# EAGLE board light sensor basic copy (EAGLE 9.6.2)
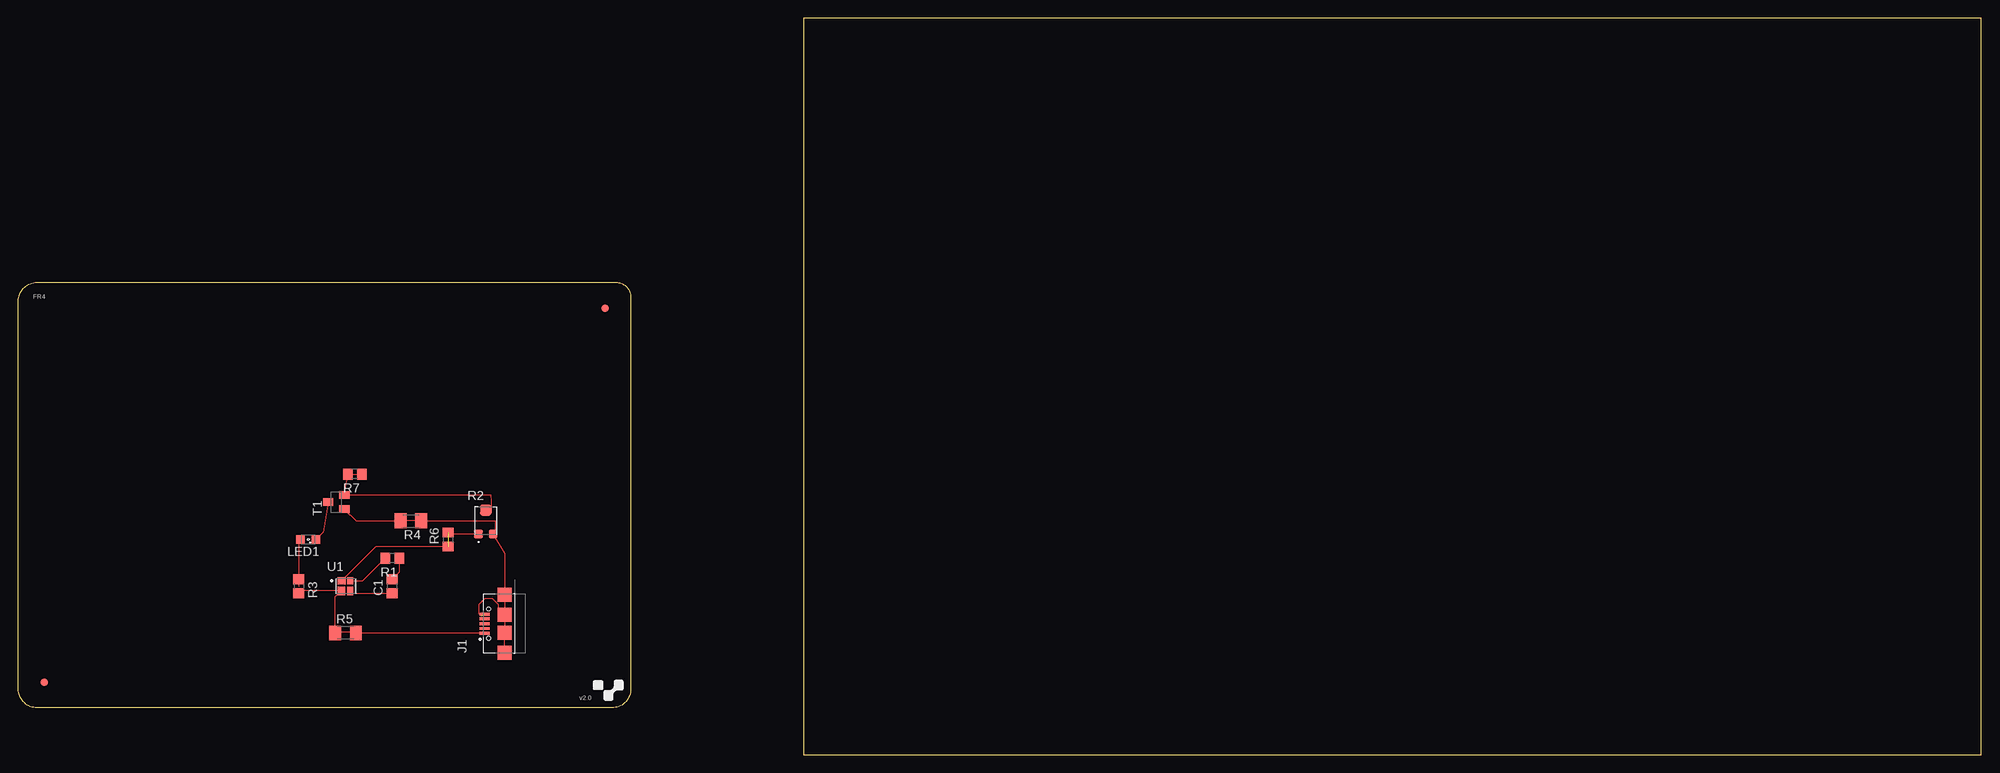
[diagram p0: board, top side]
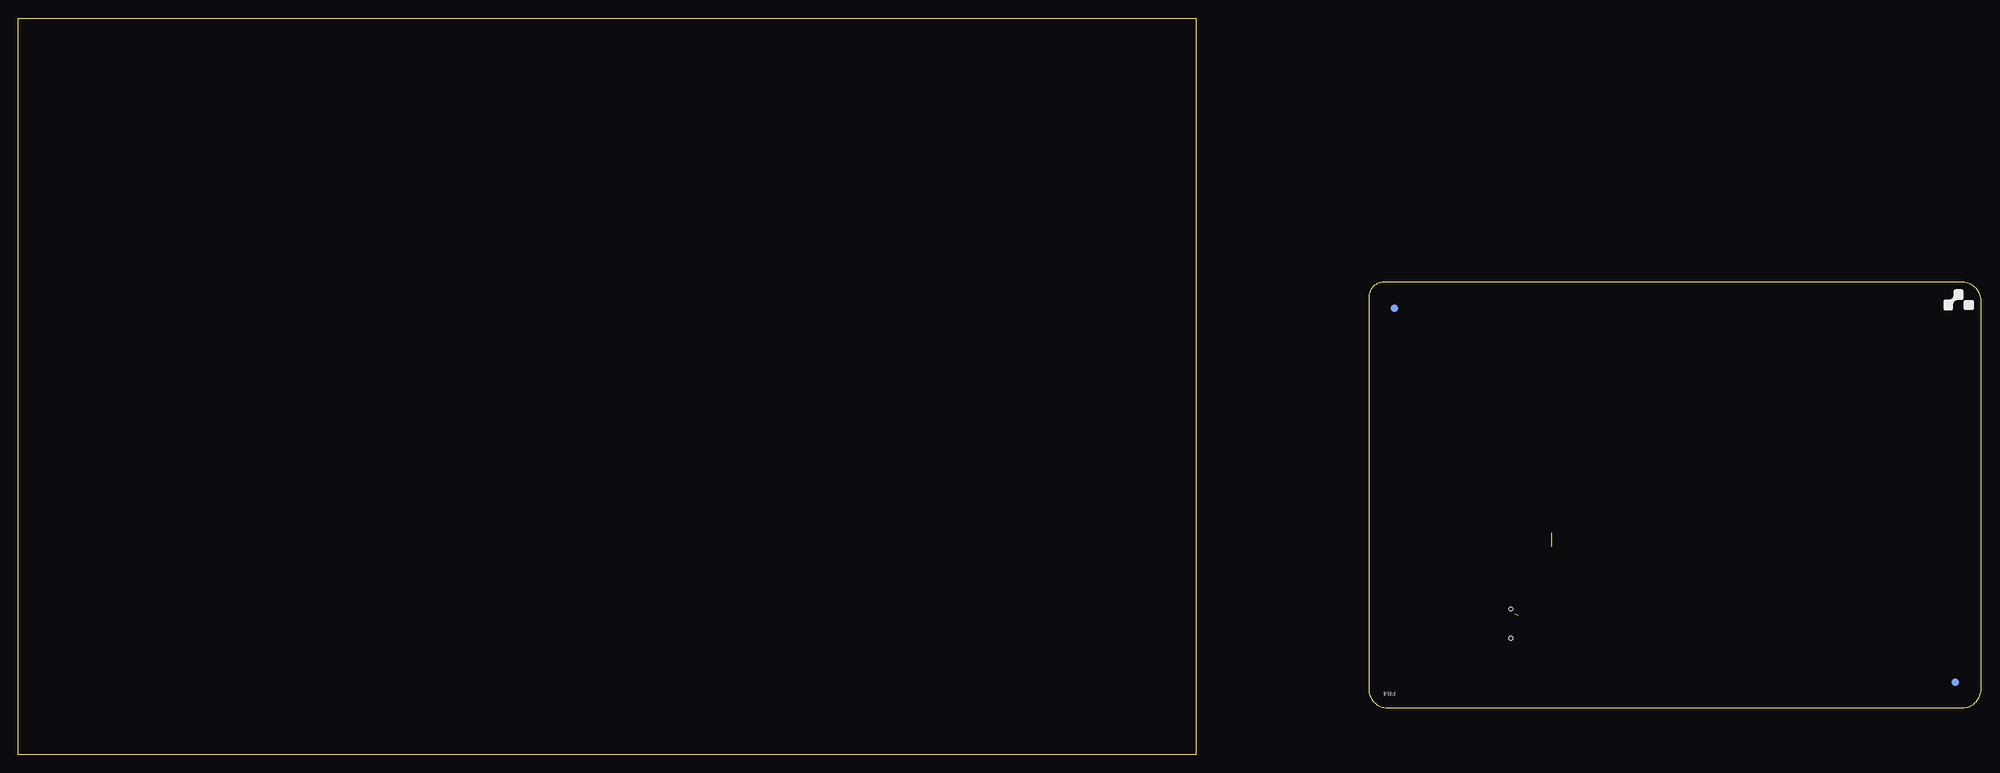
[diagram p1: board, bottom side, seen from below]

Size 266.68 x 100 mm. Coordinates in mm from the lower left corner, seen from the top.
Outline: 106.68,0 266.68,0 266.68,100 106.68,100 106.68,0
Copper layers (1*16): Top 0.035mm / dielectric 1.5mm / Bottom 0.035mm
Design rules "default": minimum track width 6mil, minimum drill 0.35mm, track to track 6mil, track to pad 6mil, pad to pad 6mil, via to via 6mil, smd to smd 6mil, copper to edge 40mil, drill to drill 6mil, minimum pad ring 10mil, minimum via ring 8mil, stop-mask expansion 4mil, vias tented up to drill 0mil, thermal gap 10mil

## Footprints (pad centres in the part's own frame; a part is rotated, then mirrored left to right if it is on the bottom)
C0805 = smd 1.3 x 1.5: 1 -0.95,0; 2 0.95,0
CUI_UJ2-MIBH-G-SMT-TR = smd 0.381 x 1.346: 1 -1.3,2.675; 2 -0.65,2.675; 3 0,2.675; 4 0.65,2.675; 5 1.3,2.675 | smd 1.9 x 1.9: S1 -3.95,0; S2 -1.2,0; S3 1.2,0; S4 3.95,0 | hole 0.55: -2,2.15; 2,2.15
SML0805 = smd 1.2 x 1.2: A 1.05,0; C -1.05,0
R0805 = smd 1.3 x 1.5: 1 -0.95,0; 2 0.95,0
SMD_TRIMM = smd 1.2 x 1.2: 1 -1,-1.8; 3 1,-1.8 | smd 1.6 x 1.5: 2 0,1.45
M1206 = smd 1.6 x 2: 1 -1.4,0; 2 1.4,0
SOT23-EBC = smd 1 x 1.4: B 0.95,-1.1; C 0,1.1; E -0.95,-1.1
XDCR_VCNT2020 = smd 0.97 x 0.95: 1 -0.57,0.725 | smd 0.97 x 1.15: 2 -0.57,-0.625 | smd 0.85 x 0.95: 3 0.63,0.725 | smd 0.85 x 1.15: 4 0.63,-0.625
2X3_BOARD_V2 = smd 1 x 1: P$1 79.7,54.3; P$3 3.5,3.5 | smd 1 x 1 bottom: P$2 79.7,54.3; P$4 3.5,3.5

## Placement (x,y rotation side)
C1  0.1 µF  [C0805]  50.8,22.86 90 top
J1  UJ2-MIBH-G-SMT-TR  [CUI_UJ2-MIBH-G-SMT-TR]  66.04,17.78 90 top
LED1  [SML0805]  39.37,29.21 180 top
R1  82  [R0805]  50.8,26.67 180 top
R2  TC33X-2-103E  [SMD_TRIMM]  63.5,31.75 0 top
R3  150  [R0805]  38.1,22.86 270 top
R4  [M1206]  53.34,31.75 180 top
R5  [M1206]  44.45,16.51 0 top
R6  [R0805]  58.42,29.21 90 top
R7  [R0805]  45.72,38.1 180 top
T1  [SOT23-EBC]  43.18,34.29 90 top
U1  VCNT2020  [XDCR_VCNT2020]  44.45,22.86 0 top
U$1  2X3_BOARD_V2  [2X3_BOARD_V2]  0,6.35 0 top

## Library data of the parts
C1 = rcl; SPICEPREFIX: C
J1 = UJ2-MIBH-G-SMT-TR; MANUFACTURER: CUI; MAXIMUM_PACKAGE_HEIGHT: 2.95 mm; PARTREV: 1.0; STANDARD: Manufacturer Recommendations
LED1 = led
R1 R3-R7 = rcl; SPICEPREFIX: R
R2 = Resistor_Capacitor; CREATED_BY: PCBLayout.com; DIGIKEY_PART_NUMBER: TC33X-103ETR-ND; MANUFACTURER: Bourns Inc.; MPN: TC33X-2-103E; PACKAGE: SMD
T1 = transistor
U1 = VCNT2020; CHECK_PRICES: https://www.snapeda.com/parts/VCNT2020/Vishay+Semiconductor+Opto+Division/view-part/?ref=eda; DESCRIPTION: Reflective Optical Sensor 0.02 (0.5mm) 4-SMD Module; DIGIKEY_PART_NUMBER: VCNT2020TR-ND; MF: Vishay; MP: VCNT2020; PACKAGE: None; SNAPEDA_LINK: https://www.snapeda.com/parts/VCNT2020/Vishay+Semiconductor+Opto+Division/view-part/?ref=snap
U$1 = voltera_community_lib

## Nets
GND: C1.1 U1.4
N$1: R1.2 U1.3
N$3: LED1.C T1.C
N$4: R2.2 R7.1 R7.2 T1.B
N$5: LED1.A R3.1
TP2: R2.1 R6.1 R6.2 U1.1
TP3: J1.1 R3.2 R5.1 R5.2 U1.2
TP4: J1.5 J1.S1 J1.S2 J1.S3 J1.S4 R2.3 R4.1 R4.2 T1.E
VCC: C1.2 R1.1

## Tracks (layer width: path | path; a pad name or v marks a point on that pad's centre or on a via)
GND
  Top 0.152: U1.4 45.41,21.91 C1.1
N$1
  Top 0.152: U1.3 46.77,23.59 R1.2
N$3
  Top 0.152: T1.C 41.43,30.22 LED1.C
N$4
  Top 0.152: R2.2 64.32,32.89 64.27,34.52 64.25,35.24 T1.B 44.28,35.71 R7.2 R7.1
N$5
  Top 0.152: LED1.A 38.1,28.99 R3.1 38.1,23.77 38.1,22.86
TP2  (1 unrouted)
  Top 0.152: 44.5,24.23 48.53,28.26 R6.1 57.78,28.26 | 44.5,24.23 44.43,24.16 44.43,23.04 | U1.1 43.89,23.62 44.5,24.23 | R2.1 58.63,29.95 R6.2
TP3
  Top 0.152: R3.2 38.43,22.23 U1.2 43.05,21.41 R5.1 43.13,16.61 45.72,16.61 R5.2 45.88,16.48 J1.1
TP4  (1 unrouted)
  Top 0.152: T1.E 45.87,31.75 R4.2 R4.1 64.77,31.75 64.77,30.22 R2.3 66.04,27.31 J1.S4 J1.S3 | J1.5 63.47,19.08 63.5,19.05 | 62.89,18.85 62.52,19.21 62.52,20.35 63.32,21.15 64.46,21.15 65.26,20.35 65.26,19.76 J1.S3 | J1.S3 J1.S2 J1.S1
VCC
  Top 0.152: R1.1 51.75,24.76 C1.2